# Altium PCB S52最小系统.PcbDoc (part 8 of 9)
Units mm, origin at the board's own origin, x right, y up, seen from the top; angles counter-clockwise.
Board outline 152.4 x 101.6 mm, 2 copper layers (Top Layer, Bottom Layer); 29 components, 53 nets, 176 pads, 2 vias.
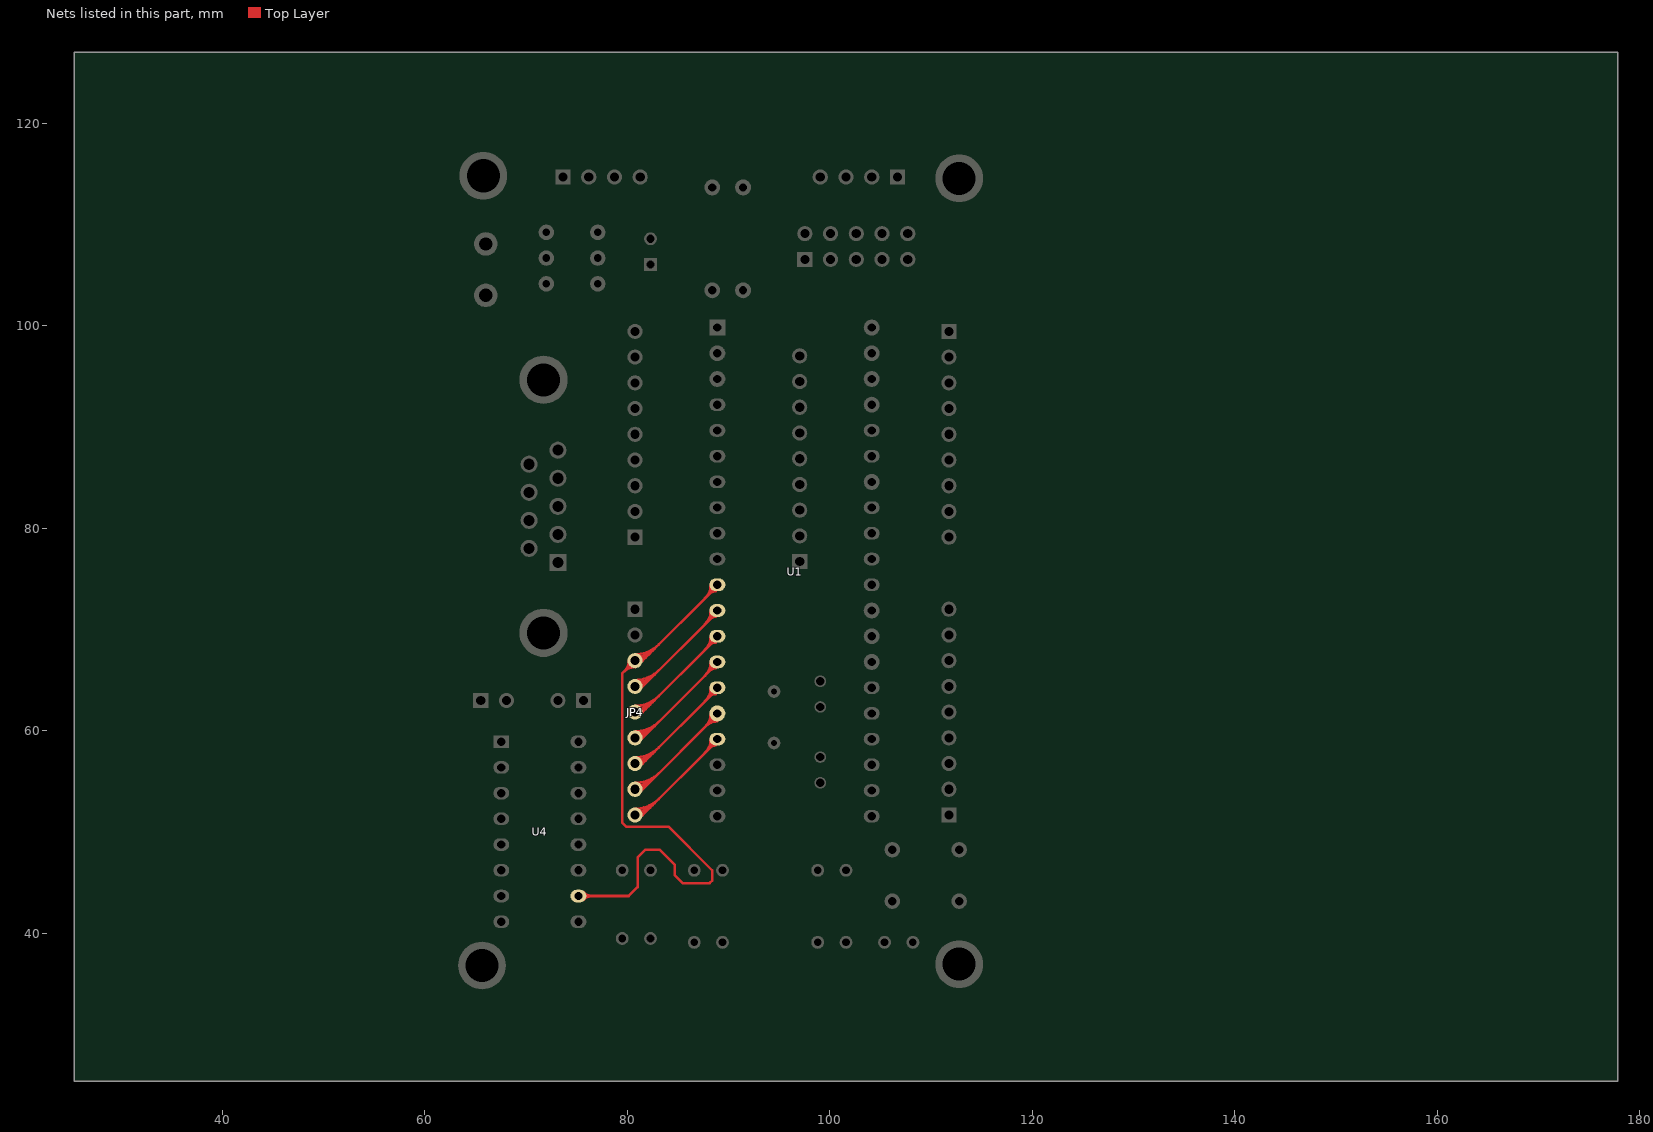
[diagram p8: the nets of this part, all layers, seen from the top]

## Via types
v1: diameter 1.27, hole 0.711, Top Layer to Bottom Layer, 2 vias

## Nets (pads, with @x,y where several pads share a name; then routed paths per layer and width w, separated by ;. In a path a pad name is that pad's centre, name@x,y a point inside that pad or via, vN(x,y) a via of type N, cw(c..) or ccw(c..) an arc to the next point about the centre after c; other vN are vias at no path point) (continued)
NetJP4_3: JP4.3 U1.11 U4.10 | length 177.4
  Top Layer w0.254: U4.10@75.18,43.687 80.136,43.687 81.026,44.577 81.026,47.498 81.788,48.26 83.185,48.26 84.709,46.736 84.709,45.72 85.471,44.958 88.138,44.958 88.392,45.212 88.392,46.228 84.074,50.546 79.883,50.546 79.502,50.927 79.502,65.659 JP4.3@80.772,66.929 81.531,66.929 ; U1.11@88.896,74.294 81.531,66.929 ; 76.545,43.687 cw(c76.545,44.889) 75.695,44.039 ccw(c76.545,44.889) 76.545,43.687 ; 76.545,43.687 ccw(c76.545,42.485) 75.695,43.335 cw(c76.545,42.485) 76.545,43.687 ; 79.708,65.865 cw(c80.772,64.802) 80.772,66.306 ccw(c80.772,64.802) 79.708,65.865 ; 79.708,65.865 ccw(c78.645,66.929) 80.149,66.929 cw(c78.645,66.929) 79.708,65.865 ; 80.142,66.299 cw(c80.772,65.669) 80.772,66.56 ccw(c80.772,65.669) 80.142,66.299 ; 80.142,66.299 ccw(c79.512,66.929) 80.403,66.929 cw(c79.512,66.929) 80.142,66.299 ; JP4.3@80.772,66.79 ccw(c80.772,68.287) 81.831,67.229 ; JP4.3@80.772,66.79 ccw(c80.772,68.287) 81.831,67.229 ; JP4.3@80.772,66.79 ccw(c80.772,68.287) 81.831,67.229 ; JP4.3@80.772,66.79 ccw(c80.772,68.287) 81.831,67.229 ; JP4.3@80.772,66.79 ccw(c80.772,68.287) 81.831,67.229 ; JP4.3@80.772,66.79 ccw(c80.772,68.287) 81.831,67.229 ; JP4.3@80.772,66.79 ccw(c80.772,68.287) 81.831,67.229 ; JP4.3@80.772,66.79 ccw(c80.772,68.287) 81.831,67.229 ; JP4.3@80.772,66.79 ccw(c80.772,68.287) 81.831,67.229 ; JP4.3@80.772,66.79 ccw(c80.772,68.287) 81.831,67.229 ; JP4.3@80.772,67.044 ccw(c80.772,69.154) 82.264,67.662 ; JP4.3@80.772,67.044 ccw(c80.772,69.154) 82.264,67.662 ; JP4.3@80.772,67.044 ccw(c80.772,69.154) 82.264,67.662 ; JP4.3@80.772,67.044 ccw(c80.772,69.154) 82.264,67.662 ; JP4.3@80.772,67.044 ccw(c80.772,69.154) 82.264,67.662 ; JP4.3@80.772,67.044 ccw(c80.772,69.154) 82.264,67.662 ; JP4.3@80.772,67.044 ccw(c80.772,69.154) 82.264,67.662 ; JP4.3@80.772,67.044 ccw(c80.772,69.154) 82.264,67.662 ; JP4.3@80.772,67.044 ccw(c80.772,69.154) 82.264,67.662 ; JP4.3@80.772,67.044 ccw(c80.772,69.154) 82.264,67.662 ; JP4.3@80.772,67.298 ccw(c80.772,70.022) 82.698,68.096 ; JP4.3@80.772,67.298 ccw(c80.772,70.022) 82.698,68.096 ; JP4.3@80.772,67.298 ccw(c80.772,70.022) 82.698,68.096 ; JP4.3@80.772,67.298 ccw(c80.772,70.022) 82.698,68.096 ; JP4.3@80.772,67.298 ccw(c80.772,70.022) 82.698,68.096 ; JP4.3@80.772,67.298 ccw(c80.772,70.022) 82.698,68.096 ; JP4.3@80.772,67.298 ccw(c80.772,70.022) 82.698,68.096 ; JP4.3@80.772,67.298 ccw(c80.772,70.022) 82.698,68.096 ; JP4.3@80.772,67.298 ccw(c80.772,70.022) 82.698,68.096 ; JP4.3@80.772,67.298 ccw(c80.772,70.022) 82.698,68.096 ; JP4.3@80.772,67.552 ccw(c80.772,70.889) 83.132,68.529 ; JP4.3@80.772,67.552 ccw(c80.772,70.889) 83.132,68.529 ; JP4.3@80.772,67.552 ccw(c80.772,70.889) 83.132,68.529 ; JP4.3@80.772,67.552 ccw(c80.772,70.889) 83.132,68.529 ; JP4.3@80.772,67.552 ccw(c80.772,70.889) 83.132,68.529 ; JP4.3@80.772,67.552 ccw(c80.772,70.889) 83.132,68.529 ; JP4.3@80.772,67.552 ccw(c80.772,70.889) 83.132,68.529 ; JP4.3@80.772,67.552 ccw(c80.772,70.889) 83.132,68.529 ; JP4.3@80.772,67.552 ccw(c80.772,70.889) 83.132,68.529 ; JP4.3@80.772,67.552 ccw(c80.772,70.889) 83.132,68.529 ; JP4.3@81.383,66.807 cw(c81.531,66.778) 81.531,66.929 ; JP4.3@81.383,66.807 cw(c81.531,66.778) 81.531,66.929 ; JP4.3@81.383,66.807 cw(c81.531,66.778) 81.531,66.929 ; JP4.3@81.383,66.807 cw(c81.531,66.778) 81.531,66.929 ; JP4.3@81.383,66.807 cw(c81.531,66.778) 81.531,66.929 ; JP4.3@81.383,66.807 cw(c81.531,66.778) 81.531,66.929 ; JP4.3@81.383,66.807 cw(c81.531,66.778) 81.531,66.929 ; JP4.3@81.383,66.807 cw(c81.531,66.778) 81.531,66.929 ; JP4.3@81.383,66.807 cw(c81.531,66.778) 81.531,66.929 ; JP4.3@81.383,66.807 cw(c81.531,66.778) 81.531,66.929 ; JP4.3@81.383,67.051 ccw(c81.531,67.08) 81.531,66.929 ; JP4.3@81.383,67.051 ccw(c81.531,67.08) 81.531,66.929 ; JP4.3@81.383,67.051 ccw(c81.531,67.08) 81.531,66.929 ; JP4.3@81.383,67.051 ccw(c81.531,67.08) 81.531,66.929 ; JP4.3@81.383,67.051 ccw(c81.531,67.08) 81.531,66.929 ; JP4.3@81.383,67.051 ccw(c81.531,67.08) 81.531,66.929 ; JP4.3@81.383,67.051 ccw(c81.531,67.08) 81.531,66.929 ; JP4.3@81.383,67.051 ccw(c81.531,67.08) 81.531,66.929 ; JP4.3@81.383,67.051 ccw(c81.531,67.08) 81.531,66.929 ; JP4.3@81.383,67.051 ccw(c81.531,67.08) 81.531,66.929 ; 87.679,73.077 ccw(c86.335,74.421) U1.11@88.236,74.421 ; 87.679,73.077 ccw(c86.335,74.421) U1.11@88.236,74.421 ; 87.679,73.077 ccw(c86.335,74.421) U1.11@88.236,74.421 ; 87.679,73.077 ccw(c86.335,74.421) U1.11@88.236,74.421 ; 87.769,73.167 ccw(c86.641,74.294) U1.11@88.236,74.294 ; 87.769,73.167 ccw(c86.641,74.294) U1.11@88.236,74.294 ; 87.769,73.167 ccw(c86.641,74.294) U1.11@88.236,74.294 ; 87.769,73.167 ccw(c86.641,74.294) U1.11@88.236,74.294 ; 87.769,73.167 ccw(c86.641,74.294) U1.11@88.236,74.294 ; 87.769,73.167 ccw(c86.641,74.294) U1.11@88.236,74.294 ; 88.113,73.51 ccw(c87.202,74.421) U1.11@88.49,74.421 ; 88.113,73.51 ccw(c87.202,74.421) U1.11@88.49,74.421 ; 88.113,73.51 ccw(c87.202,74.421) U1.11@88.49,74.421 ; 88.113,73.51 ccw(c87.202,74.421) U1.11@88.49,74.421 ; 88.161,73.559 cw(c88.734,72.986) U1.11@88.734,73.796 ; 88.161,73.559 cw(c88.734,72.986) U1.11@88.734,73.796 ; 88.161,73.559 cw(c88.734,72.986) U1.11@88.734,73.796 ; 88.161,73.559 cw(c88.734,72.986) U1.11@88.734,73.796 ; 88.161,73.559 cw(c88.734,72.986) U1.11@88.734,73.796 ; 88.161,73.559 cw(c88.734,72.986) U1.11@88.734,73.796 ; 88.202,73.6 ccw(c87.509,74.294) U1.11@88.49,74.294 ; 88.202,73.6 ccw(c87.509,74.294) U1.11@88.49,74.294 ; 88.202,73.6 ccw(c87.509,74.294) U1.11@88.49,74.294 ; 88.202,73.6 ccw(c87.509,74.294) U1.11@88.49,74.294 ; 88.202,73.6 ccw(c87.509,74.294) U1.11@88.49,74.294 ; 88.202,73.6 ccw(c87.509,74.294) U1.11@88.49,74.294 ; 88.378,73.775 cw(c88.734,73.419) U1.11@88.734,73.923 ; 88.378,73.775 cw(c88.734,73.419) U1.11@88.734,73.923 ; 88.378,73.775 cw(c88.734,73.419) U1.11@88.734,73.923 ; 88.378,73.775 cw(c88.734,73.419) U1.11@88.734,73.923
NetJP4_4: JP4.4 U1.12 | length 118.8
  Top Layer w0.254: JP4.4@80.772,64.389 81.531,64.389 ; U1.12@88.896,71.754 81.531,64.389 ; JP4.4@80.772,64.25 ccw(c80.772,65.747) 81.831,64.689 ; JP4.4@80.772,64.25 ccw(c80.772,65.747) 81.831,64.689 ; JP4.4@80.772,64.25 ccw(c80.772,65.747) 81.831,64.689 ; JP4.4@80.772,64.25 ccw(c80.772,65.747) 81.831,64.689 ; JP4.4@80.772,64.25 ccw(c80.772,65.747) 81.831,64.689 ; JP4.4@80.772,64.25 ccw(c80.772,65.747) 81.831,64.689 ; JP4.4@80.772,64.25 ccw(c80.772,65.747) 81.831,64.689 ; JP4.4@80.772,64.25 ccw(c80.772,65.747) 81.831,64.689 ; JP4.4@80.772,64.25 ccw(c80.772,65.747) 81.831,64.689 ; JP4.4@80.772,64.25 ccw(c80.772,65.747) 81.831,64.689 ; JP4.4@80.772,64.504 ccw(c80.772,66.614) 82.264,65.122 ; JP4.4@80.772,64.504 ccw(c80.772,66.614) 82.264,65.122 ; JP4.4@80.772,64.504 ccw(c80.772,66.614) 82.264,65.122 ; JP4.4@80.772,64.504 ccw(c80.772,66.614) 82.264,65.122 ; JP4.4@80.772,64.504 ccw(c80.772,66.614) 82.264,65.122 ; JP4.4@80.772,64.504 ccw(c80.772,66.614) 82.264,65.122 ; JP4.4@80.772,64.504 ccw(c80.772,66.614) 82.264,65.122 ; JP4.4@80.772,64.504 ccw(c80.772,66.614) 82.264,65.122 ; JP4.4@80.772,64.504 ccw(c80.772,66.614) 82.264,65.122 ; JP4.4@80.772,64.504 ccw(c80.772,66.614) 82.264,65.122 ; JP4.4@80.772,64.758 ccw(c80.772,67.482) 82.698,65.556 ; JP4.4@80.772,64.758 ccw(c80.772,67.482) 82.698,65.556 ; JP4.4@80.772,64.758 ccw(c80.772,67.482) 82.698,65.556 ; JP4.4@80.772,64.758 ccw(c80.772,67.482) 82.698,65.556 ; JP4.4@80.772,64.758 ccw(c80.772,67.482) 82.698,65.556 ; JP4.4@80.772,64.758 ccw(c80.772,67.482) 82.698,65.556 ; JP4.4@80.772,64.758 ccw(c80.772,67.482) 82.698,65.556 ; JP4.4@80.772,64.758 ccw(c80.772,67.482) 82.698,65.556 ; JP4.4@80.772,64.758 ccw(c80.772,67.482) 82.698,65.556 ; JP4.4@80.772,64.758 ccw(c80.772,67.482) 82.698,65.556 ; JP4.4@80.772,65.012 ccw(c80.772,68.349) 83.132,65.989 ; JP4.4@80.772,65.012 ccw(c80.772,68.349) 83.132,65.989 ; JP4.4@80.772,65.012 ccw(c80.772,68.349) 83.132,65.989 ; JP4.4@80.772,65.012 ccw(c80.772,68.349) 83.132,65.989 ; JP4.4@80.772,65.012 ccw(c80.772,68.349) 83.132,65.989 ; JP4.4@80.772,65.012 ccw(c80.772,68.349) 83.132,65.989 ; JP4.4@80.772,65.012 ccw(c80.772,68.349) 83.132,65.989 ; JP4.4@80.772,65.012 ccw(c80.772,68.349) 83.132,65.989 ; JP4.4@80.772,65.012 ccw(c80.772,68.349) 83.132,65.989 ; JP4.4@80.772,65.012 ccw(c80.772,68.349) 83.132,65.989 ; JP4.4@81.383,64.267 cw(c81.531,64.238) 81.531,64.389 ; JP4.4@81.383,64.267 cw(c81.531,64.238) 81.531,64.389 ; JP4.4@81.383,64.267 cw(c81.531,64.238) 81.531,64.389 ; JP4.4@81.383,64.267 cw(c81.531,64.238) 81.531,64.389 ; JP4.4@81.383,64.267 cw(c81.531,64.238) 81.531,64.389 ; JP4.4@81.383,64.267 cw(c81.531,64.238) 81.531,64.389 ; JP4.4@81.383,64.267 cw(c81.531,64.238) 81.531,64.389 ; JP4.4@81.383,64.267 cw(c81.531,64.238) 81.531,64.389 ; JP4.4@81.383,64.267 cw(c81.531,64.238) 81.531,64.389 ; JP4.4@81.383,64.267 cw(c81.531,64.238) 81.531,64.389 ; JP4.4@81.383,64.511 ccw(c81.531,64.54) 81.531,64.389 ; JP4.4@81.383,64.511 ccw(c81.531,64.54) 81.531,64.389 ; JP4.4@81.383,64.511 ccw(c81.531,64.54) 81.531,64.389 ; JP4.4@81.383,64.511 ccw(c81.531,64.54) 81.531,64.389 ; JP4.4@81.383,64.511 ccw(c81.531,64.54) 81.531,64.389 ; JP4.4@81.383,64.511 ccw(c81.531,64.54) 81.531,64.389 ; JP4.4@81.383,64.511 ccw(c81.531,64.54) 81.531,64.389 ; JP4.4@81.383,64.511 ccw(c81.531,64.54) 81.531,64.389 ; JP4.4@81.383,64.511 ccw(c81.531,64.54) 81.531,64.389 ; JP4.4@81.383,64.511 ccw(c81.531,64.54) 81.531,64.389 ; 87.679,70.537 ccw(c86.335,71.881) U1.12@88.236,71.881 ; 87.679,70.537 ccw(c86.335,71.881) U1.12@88.236,71.881 ; 87.679,70.537 ccw(c86.335,71.881) U1.12@88.236,71.881 ; 87.679,70.537 ccw(c86.335,71.881) U1.12@88.236,71.881 ; 87.769,70.627 ccw(c86.641,71.754) U1.12@88.236,71.754 ; 87.769,70.627 ccw(c86.641,71.754) U1.12@88.236,71.754 ; 87.769,70.627 ccw(c86.641,71.754) U1.12@88.236,71.754 ; 87.769,70.627 ccw(c86.641,71.754) U1.12@88.236,71.754 ; 87.769,70.627 ccw(c86.641,71.754) U1.12@88.236,71.754 ; 87.769,70.627 ccw(c86.641,71.754) U1.12@88.236,71.754 ; 88.113,70.97 ccw(c87.202,71.881) U1.12@88.49,71.881 ; 88.113,70.97 ccw(c87.202,71.881) U1.12@88.49,71.881 ; 88.113,70.97 ccw(c87.202,71.881) U1.12@88.49,71.881 ; 88.113,70.97 ccw(c87.202,71.881) U1.12@88.49,71.881 ; 88.161,71.019 cw(c88.734,70.446) U1.12@88.734,71.256 ; 88.161,71.019 cw(c88.734,70.446) U1.12@88.734,71.256 ; 88.161,71.019 cw(c88.734,70.446) U1.12@88.734,71.256 ; 88.161,71.019 cw(c88.734,70.446) U1.12@88.734,71.256 ; 88.161,71.019 cw(c88.734,70.446) U1.12@88.734,71.256 ; 88.161,71.019 cw(c88.734,70.446) U1.12@88.734,71.256 ; 88.202,71.06 ccw(c87.509,71.754) U1.12@88.49,71.754 ; 88.202,71.06 ccw(c87.509,71.754) U1.12@88.49,71.754 ; 88.202,71.06 ccw(c87.509,71.754) U1.12@88.49,71.754 ; 88.202,71.06 ccw(c87.509,71.754) U1.12@88.49,71.754 ; 88.202,71.06 ccw(c87.509,71.754) U1.12@88.49,71.754 ; 88.202,71.06 ccw(c87.509,71.754) U1.12@88.49,71.754 ; 88.378,71.235 cw(c88.734,70.879) U1.12@88.734,71.383 ; 88.378,71.235 cw(c88.734,70.879) U1.12@88.734,71.383 ; 88.378,71.235 cw(c88.734,70.879) U1.12@88.734,71.383 ; 88.378,71.235 cw(c88.734,70.879) U1.12@88.734,71.383
NetJP4_5: JP4.5 U1.13 | length 118.8
  Top Layer w0.254: JP4.5@80.772,61.849 81.531,61.849 ; U1.13@88.896,69.214 81.531,61.849 ; JP4.5@80.772,61.71 ccw(c80.772,63.207) 81.831,62.149 ; JP4.5@80.772,61.71 ccw(c80.772,63.207) 81.831,62.149 ; JP4.5@80.772,61.71 ccw(c80.772,63.207) 81.831,62.149 ; JP4.5@80.772,61.71 ccw(c80.772,63.207) 81.831,62.149 ; JP4.5@80.772,61.71 ccw(c80.772,63.207) 81.831,62.149 ; JP4.5@80.772,61.71 ccw(c80.772,63.207) 81.831,62.149 ; JP4.5@80.772,61.71 ccw(c80.772,63.207) 81.831,62.149 ; JP4.5@80.772,61.71 ccw(c80.772,63.207) 81.831,62.149 ; JP4.5@80.772,61.71 ccw(c80.772,63.207) 81.831,62.149 ; JP4.5@80.772,61.71 ccw(c80.772,63.207) 81.831,62.149 ; JP4.5@80.772,61.964 ccw(c80.772,64.074) 82.264,62.582 ; JP4.5@80.772,61.964 ccw(c80.772,64.074) 82.264,62.582 ; JP4.5@80.772,61.964 ccw(c80.772,64.074) 82.264,62.582 ; JP4.5@80.772,61.964 ccw(c80.772,64.074) 82.264,62.582 ; JP4.5@80.772,61.964 ccw(c80.772,64.074) 82.264,62.582 ; JP4.5@80.772,61.964 ccw(c80.772,64.074) 82.264,62.582 ; JP4.5@80.772,61.964 ccw(c80.772,64.074) 82.264,62.582 ; JP4.5@80.772,61.964 ccw(c80.772,64.074) 82.264,62.582 ; JP4.5@80.772,61.964 ccw(c80.772,64.074) 82.264,62.582 ; JP4.5@80.772,61.964 ccw(c80.772,64.074) 82.264,62.582 ; JP4.5@80.772,62.218 ccw(c80.772,64.942) 82.698,63.016 ; JP4.5@80.772,62.218 ccw(c80.772,64.942) 82.698,63.016 ; JP4.5@80.772,62.218 ccw(c80.772,64.942) 82.698,63.016 ; JP4.5@80.772,62.218 ccw(c80.772,64.942) 82.698,63.016 ; JP4.5@80.772,62.218 ccw(c80.772,64.942) 82.698,63.016 ; JP4.5@80.772,62.218 ccw(c80.772,64.942) 82.698,63.016 ; JP4.5@80.772,62.218 ccw(c80.772,64.942) 82.698,63.016 ; JP4.5@80.772,62.218 ccw(c80.772,64.942) 82.698,63.016 ; JP4.5@80.772,62.218 ccw(c80.772,64.942) 82.698,63.016 ; JP4.5@80.772,62.218 ccw(c80.772,64.942) 82.698,63.016 ; JP4.5@80.772,62.472 ccw(c80.772,65.809) 83.132,63.449 ; JP4.5@80.772,62.472 ccw(c80.772,65.809) 83.132,63.449 ; JP4.5@80.772,62.472 ccw(c80.772,65.809) 83.132,63.449 ; JP4.5@80.772,62.472 ccw(c80.772,65.809) 83.132,63.449 ; JP4.5@80.772,62.472 ccw(c80.772,65.809) 83.132,63.449 ; JP4.5@80.772,62.472 ccw(c80.772,65.809) 83.132,63.449 ; JP4.5@80.772,62.472 ccw(c80.772,65.809) 83.132,63.449 ; JP4.5@80.772,62.472 ccw(c80.772,65.809) 83.132,63.449 ; JP4.5@80.772,62.472 ccw(c80.772,65.809) 83.132,63.449 ; JP4.5@80.772,62.472 ccw(c80.772,65.809) 83.132,63.449 ; JP4.5@81.383,61.727 cw(c81.531,61.698) 81.531,61.849 ; JP4.5@81.383,61.727 cw(c81.531,61.698) 81.531,61.849 ; JP4.5@81.383,61.727 cw(c81.531,61.698) 81.531,61.849 ; JP4.5@81.383,61.727 cw(c81.531,61.698) 81.531,61.849 ; JP4.5@81.383,61.727 cw(c81.531,61.698) 81.531,61.849 ; JP4.5@81.383,61.727 cw(c81.531,61.698) 81.531,61.849 ; JP4.5@81.383,61.727 cw(c81.531,61.698) 81.531,61.849 ; JP4.5@81.383,61.727 cw(c81.531,61.698) 81.531,61.849 ; JP4.5@81.383,61.727 cw(c81.531,61.698) 81.531,61.849 ; JP4.5@81.383,61.727 cw(c81.531,61.698) 81.531,61.849 ; JP4.5@81.383,61.971 ccw(c81.531,62) 81.531,61.849 ; JP4.5@81.383,61.971 ccw(c81.531,62) 81.531,61.849 ; JP4.5@81.383,61.971 ccw(c81.531,62) 81.531,61.849 ; JP4.5@81.383,61.971 ccw(c81.531,62) 81.531,61.849 ; JP4.5@81.383,61.971 ccw(c81.531,62) 81.531,61.849 ; JP4.5@81.383,61.971 ccw(c81.531,62) 81.531,61.849 ; JP4.5@81.383,61.971 ccw(c81.531,62) 81.531,61.849 ; JP4.5@81.383,61.971 ccw(c81.531,62) 81.531,61.849 ; JP4.5@81.383,61.971 ccw(c81.531,62) 81.531,61.849 ; JP4.5@81.383,61.971 ccw(c81.531,62) 81.531,61.849 ; 87.679,67.997 ccw(c86.335,69.341) U1.13@88.236,69.341 ; 87.679,67.997 ccw(c86.335,69.341) U1.13@88.236,69.341 ; 87.679,67.997 ccw(c86.335,69.341) U1.13@88.236,69.341 ; 87.679,67.997 ccw(c86.335,69.341) U1.13@88.236,69.341 ; 87.769,68.087 ccw(c86.641,69.214) U1.13@88.236,69.214 ; 87.769,68.087 ccw(c86.641,69.214) U1.13@88.236,69.214 ; 87.769,68.087 ccw(c86.641,69.214) U1.13@88.236,69.214 ; 87.769,68.087 ccw(c86.641,69.214) U1.13@88.236,69.214 ; 87.769,68.087 ccw(c86.641,69.214) U1.13@88.236,69.214 ; 87.769,68.087 ccw(c86.641,69.214) U1.13@88.236,69.214 ; 88.113,68.43 ccw(c87.202,69.341) U1.13@88.49,69.341 ; 88.113,68.43 ccw(c87.202,69.341) U1.13@88.49,69.341 ; 88.113,68.43 ccw(c87.202,69.341) U1.13@88.49,69.341 ; 88.113,68.43 ccw(c87.202,69.341) U1.13@88.49,69.341 ; 88.161,68.479 cw(c88.734,67.906) U1.13@88.734,68.716 ; 88.161,68.479 cw(c88.734,67.906) U1.13@88.734,68.716 ; 88.161,68.479 cw(c88.734,67.906) U1.13@88.734,68.716 ; 88.161,68.479 cw(c88.734,67.906) U1.13@88.734,68.716 ; 88.161,68.479 cw(c88.734,67.906) U1.13@88.734,68.716 ; 88.161,68.479 cw(c88.734,67.906) U1.13@88.734,68.716 ; 88.202,68.52 ccw(c87.509,69.214) U1.13@88.49,69.214 ; 88.202,68.52 ccw(c87.509,69.214) U1.13@88.49,69.214 ; 88.202,68.52 ccw(c87.509,69.214) U1.13@88.49,69.214 ; 88.202,68.52 ccw(c87.509,69.214) U1.13@88.49,69.214 ; 88.202,68.52 ccw(c87.509,69.214) U1.13@88.49,69.214 ; 88.202,68.52 ccw(c87.509,69.214) U1.13@88.49,69.214 ; 88.378,68.695 cw(c88.734,68.339) U1.13@88.734,68.843 ; 88.378,68.695 cw(c88.734,68.339) U1.13@88.734,68.843 ; 88.378,68.695 cw(c88.734,68.339) U1.13@88.734,68.843 ; 88.378,68.695 cw(c88.734,68.339) U1.13@88.734,68.843
NetJP4_6: JP4.6 U1.14 | length 118.8
  Top Layer w0.254: JP4.6@80.772,59.309 81.531,59.309 ; U1.14@88.896,66.674 81.531,59.309 ; JP4.6@80.772,59.17 ccw(c80.772,60.667) 81.831,59.609 ; JP4.6@80.772,59.17 ccw(c80.772,60.667) 81.831,59.609 ; JP4.6@80.772,59.17 ccw(c80.772,60.667) 81.831,59.609 ; JP4.6@80.772,59.17 ccw(c80.772,60.667) 81.831,59.609 ; JP4.6@80.772,59.17 ccw(c80.772,60.667) 81.831,59.609 ; JP4.6@80.772,59.17 ccw(c80.772,60.667) 81.831,59.609 ; JP4.6@80.772,59.17 ccw(c80.772,60.667) 81.831,59.609 ; JP4.6@80.772,59.17 ccw(c80.772,60.667) 81.831,59.609 ; JP4.6@80.772,59.17 ccw(c80.772,60.667) 81.831,59.609 ; JP4.6@80.772,59.17 ccw(c80.772,60.667) 81.831,59.609 ; JP4.6@80.772,59.424 ccw(c80.772,61.534) 82.264,60.042 ; JP4.6@80.772,59.424 ccw(c80.772,61.534) 82.264,60.042 ; JP4.6@80.772,59.424 ccw(c80.772,61.534) 82.264,60.042 ; JP4.6@80.772,59.424 ccw(c80.772,61.534) 82.264,60.042 ; JP4.6@80.772,59.424 ccw(c80.772,61.534) 82.264,60.042 ; JP4.6@80.772,59.424 ccw(c80.772,61.534) 82.264,60.042 ; JP4.6@80.772,59.424 ccw(c80.772,61.534) 82.264,60.042 ; JP4.6@80.772,59.424 ccw(c80.772,61.534) 82.264,60.042 ; JP4.6@80.772,59.424 ccw(c80.772,61.534) 82.264,60.042 ; JP4.6@80.772,59.424 ccw(c80.772,61.534) 82.264,60.042 ; JP4.6@80.772,59.678 ccw(c80.772,62.402) 82.698,60.476 ; JP4.6@80.772,59.678 ccw(c80.772,62.402) 82.698,60.476 ; JP4.6@80.772,59.678 ccw(c80.772,62.402) 82.698,60.476 ; JP4.6@80.772,59.678 ccw(c80.772,62.402) 82.698,60.476 ; JP4.6@80.772,59.678 ccw(c80.772,62.402) 82.698,60.476 ; JP4.6@80.772,59.678 ccw(c80.772,62.402) 82.698,60.476 ; JP4.6@80.772,59.678 ccw(c80.772,62.402) 82.698,60.476 ; JP4.6@80.772,59.678 ccw(c80.772,62.402) 82.698,60.476 ; JP4.6@80.772,59.678 ccw(c80.772,62.402) 82.698,60.476 ; JP4.6@80.772,59.678 ccw(c80.772,62.402) 82.698,60.476 ; JP4.6@80.772,59.932 ccw(c80.772,63.269) 83.132,60.909 ; JP4.6@80.772,59.932 ccw(c80.772,63.269) 83.132,60.909 ; JP4.6@80.772,59.932 ccw(c80.772,63.269) 83.132,60.909 ; JP4.6@80.772,59.932 ccw(c80.772,63.269) 83.132,60.909 ; JP4.6@80.772,59.932 ccw(c80.772,63.269) 83.132,60.909 ; JP4.6@80.772,59.932 ccw(c80.772,63.269) 83.132,60.909 ; JP4.6@80.772,59.932 ccw(c80.772,63.269) 83.132,60.909 ; JP4.6@80.772,59.932 ccw(c80.772,63.269) 83.132,60.909 ; JP4.6@80.772,59.932 ccw(c80.772,63.269) 83.132,60.909 ; JP4.6@80.772,59.932 ccw(c80.772,63.269) 83.132,60.909 ; JP4.6@81.383,59.187 cw(c81.531,59.158) 81.531,59.309 ; JP4.6@81.383,59.187 cw(c81.531,59.158) 81.531,59.309 ; JP4.6@81.383,59.187 cw(c81.531,59.158) 81.531,59.309 ; JP4.6@81.383,59.187 cw(c81.531,59.158) 81.531,59.309 ; JP4.6@81.383,59.187 cw(c81.531,59.158) 81.531,59.309 ; JP4.6@81.383,59.187 cw(c81.531,59.158) 81.531,59.309 ; JP4.6@81.383,59.187 cw(c81.531,59.158) 81.531,59.309 ; JP4.6@81.383,59.187 cw(c81.531,59.158) 81.531,59.309 ; JP4.6@81.383,59.187 cw(c81.531,59.158) 81.531,59.309 ; JP4.6@81.383,59.187 cw(c81.531,59.158) 81.531,59.309 ; JP4.6@81.383,59.431 ccw(c81.531,59.46) 81.531,59.309 ; JP4.6@81.383,59.431 ccw(c81.531,59.46) 81.531,59.309 ; JP4.6@81.383,59.431 ccw(c81.531,59.46) 81.531,59.309 ; JP4.6@81.383,59.431 ccw(c81.531,59.46) 81.531,59.309 ; JP4.6@81.383,59.431 ccw(c81.531,59.46) 81.531,59.309 ; JP4.6@81.383,59.431 ccw(c81.531,59.46) 81.531,59.309 ; JP4.6@81.383,59.431 ccw(c81.531,59.46) 81.531,59.309 ; JP4.6@81.383,59.431 ccw(c81.531,59.46) 81.531,59.309 ; JP4.6@81.383,59.431 ccw(c81.531,59.46) 81.531,59.309 ; JP4.6@81.383,59.431 ccw(c81.531,59.46) 81.531,59.309 ; 87.679,65.457 ccw(c86.335,66.801) U1.14@88.236,66.801 ; 87.679,65.457 ccw(c86.335,66.801) U1.14@88.236,66.801 ; 87.679,65.457 ccw(c86.335,66.801) U1.14@88.236,66.801 ; 87.679,65.457 ccw(c86.335,66.801) U1.14@88.236,66.801 ; 87.769,65.547 ccw(c86.641,66.674) U1.14@88.236,66.674 ; 87.769,65.547 ccw(c86.641,66.674) U1.14@88.236,66.674 ; 87.769,65.547 ccw(c86.641,66.674) U1.14@88.236,66.674 ; 87.769,65.547 ccw(c86.641,66.674) U1.14@88.236,66.674 ; 87.769,65.547 ccw(c86.641,66.674) U1.14@88.236,66.674 ; 87.769,65.547 ccw(c86.641,66.674) U1.14@88.236,66.674 ; 88.113,65.89 ccw(c87.202,66.801) U1.14@88.49,66.801 ; 88.113,65.89 ccw(c87.202,66.801) U1.14@88.49,66.801 ; 88.113,65.89 ccw(c87.202,66.801) U1.14@88.49,66.801 ; 88.113,65.89 ccw(c87.202,66.801) U1.14@88.49,66.801 ; 88.161,65.939 cw(c88.734,65.366) U1.14@88.734,66.176 ; 88.161,65.939 cw(c88.734,65.366) U1.14@88.734,66.176 ; 88.161,65.939 cw(c88.734,65.366) U1.14@88.734,66.176 ; 88.161,65.939 cw(c88.734,65.366) U1.14@88.734,66.176 ; 88.161,65.939 cw(c88.734,65.366) U1.14@88.734,66.176 ; 88.161,65.939 cw(c88.734,65.366) U1.14@88.734,66.176 ; 88.202,65.98 ccw(c87.509,66.674) U1.14@88.49,66.674 ; 88.202,65.98 ccw(c87.509,66.674) U1.14@88.49,66.674 ; 88.202,65.98 ccw(c87.509,66.674) U1.14@88.49,66.674 ; 88.202,65.98 ccw(c87.509,66.674) U1.14@88.49,66.674 ; 88.202,65.98 ccw(c87.509,66.674) U1.14@88.49,66.674 ; 88.202,65.98 ccw(c87.509,66.674) U1.14@88.49,66.674 ; 88.378,66.155 cw(c88.734,65.799) U1.14@88.734,66.303 ; 88.378,66.155 cw(c88.734,65.799) U1.14@88.734,66.303 ; 88.378,66.155 cw(c88.734,65.799) U1.14@88.734,66.303 ; 88.378,66.155 cw(c88.734,65.799) U1.14@88.734,66.303
NetJP4_7: JP4.7 U1.15 | length 118.8
  Top Layer w0.254: JP4.7@80.772,56.769 81.531,56.769 ; U1.15@88.896,64.134 81.531,56.769 ; JP4.7@80.772,56.63 ccw(c80.772,58.127) 81.831,57.069 ; JP4.7@80.772,56.63 ccw(c80.772,58.127) 81.831,57.069 ; JP4.7@80.772,56.63 ccw(c80.772,58.127) 81.831,57.069 ; JP4.7@80.772,56.63 ccw(c80.772,58.127) 81.831,57.069 ; JP4.7@80.772,56.63 ccw(c80.772,58.127) 81.831,57.069 ; JP4.7@80.772,56.63 ccw(c80.772,58.127) 81.831,57.069 ; JP4.7@80.772,56.63 ccw(c80.772,58.127) 81.831,57.069 ; JP4.7@80.772,56.63 ccw(c80.772,58.127) 81.831,57.069 ; JP4.7@80.772,56.63 ccw(c80.772,58.127) 81.831,57.069 ; JP4.7@80.772,56.63 ccw(c80.772,58.127) 81.831,57.069 ; JP4.7@80.772,56.884 ccw(c80.772,58.994) 82.264,57.502 ; JP4.7@80.772,56.884 ccw(c80.772,58.994) 82.264,57.502 ; JP4.7@80.772,56.884 ccw(c80.772,58.994) 82.264,57.502 ; JP4.7@80.772,56.884 ccw(c80.772,58.994) 82.264,57.502 ; JP4.7@80.772,56.884 ccw(c80.772,58.994) 82.264,57.502 ; JP4.7@80.772,56.884 ccw(c80.772,58.994) 82.264,57.502 ; JP4.7@80.772,56.884 ccw(c80.772,58.994) 82.264,57.502 ; JP4.7@80.772,56.884 ccw(c80.772,58.994) 82.264,57.502 ; JP4.7@80.772,56.884 ccw(c80.772,58.994) 82.264,57.502 ; JP4.7@80.772,56.884 ccw(c80.772,58.994) 82.264,57.502 ; JP4.7@80.772,57.138 ccw(c80.772,59.862) 82.698,57.936 ; JP4.7@80.772,57.138 ccw(c80.772,59.862) 82.698,57.936 ; JP4.7@80.772,57.138 ccw(c80.772,59.862) 82.698,57.936 ; JP4.7@80.772,57.138 ccw(c80.772,59.862) 82.698,57.936 ; JP4.7@80.772,57.138 ccw(c80.772,59.862) 82.698,57.936 ; JP4.7@80.772,57.138 ccw(c80.772,59.862) 82.698,57.936 ; JP4.7@80.772,57.138 ccw(c80.772,59.862) 82.698,57.936 ; JP4.7@80.772,57.138 ccw(c80.772,59.862) 82.698,57.936 ; JP4.7@80.772,57.138 ccw(c80.772,59.862) 82.698,57.936 ; JP4.7@80.772,57.138 ccw(c80.772,59.862) 82.698,57.936 ; JP4.7@80.772,57.392 ccw(c80.772,60.729) 83.132,58.369 ; JP4.7@80.772,57.392 ccw(c80.772,60.729) 83.132,58.369 ; JP4.7@80.772,57.392 ccw(c80.772,60.729) 83.132,58.369 ; JP4.7@80.772,57.392 ccw(c80.772,60.729) 83.132,58.369 ; JP4.7@80.772,57.392 ccw(c80.772,60.729) 83.132,58.369 ; JP4.7@80.772,57.392 ccw(c80.772,60.729) 83.132,58.369 ; JP4.7@80.772,57.392 ccw(c80.772,60.729) 83.132,58.369 ; JP4.7@80.772,57.392 ccw(c80.772,60.729) 83.132,58.369 ; JP4.7@80.772,57.392 ccw(c80.772,60.729) 83.132,58.369 ; JP4.7@80.772,57.392 ccw(c80.772,60.729) 83.132,58.369 ; JP4.7@81.383,56.647 cw(c81.531,56.618) 81.531,56.769 ; JP4.7@81.383,56.647 cw(c81.531,56.618) 81.531,56.769 ; JP4.7@81.383,56.647 cw(c81.531,56.618) 81.531,56.769 ; JP4.7@81.383,56.647 cw(c81.531,56.618) 81.531,56.769 ; JP4.7@81.383,56.647 cw(c81.531,56.618) 81.531,56.769 ; JP4.7@81.383,56.647 cw(c81.531,56.618) 81.531,56.769 ; JP4.7@81.383,56.647 cw(c81.531,56.618) 81.531,56.769 ; JP4.7@81.383,56.647 cw(c81.531,56.618) 81.531,56.769 ; JP4.7@81.383,56.647 cw(c81.531,56.618) 81.531,56.769 ; JP4.7@81.383,56.647 cw(c81.531,56.618) 81.531,56.769 ; JP4.7@81.383,56.891 ccw(c81.531,56.92) 81.531,56.769 ; JP4.7@81.383,56.891 ccw(c81.531,56.92) 81.531,56.769 ; JP4.7@81.383,56.891 ccw(c81.531,56.92) 81.531,56.769 ; JP4.7@81.383,56.891 ccw(c81.531,56.92) 81.531,56.769 ; JP4.7@81.383,56.891 ccw(c81.531,56.92) 81.531,56.769 ; JP4.7@81.383,56.891 ccw(c81.531,56.92) 81.531,56.769 ; JP4.7@81.383,56.891 ccw(c81.531,56.92) 81.531,56.769 ; JP4.7@81.383,56.891 ccw(c81.531,56.92) 81.531,56.769 ; JP4.7@81.383,56.891 ccw(c81.531,56.92) 81.531,56.769 ; JP4.7@81.383,56.891 ccw(c81.531,56.92) 81.531,56.769 ; 87.679,62.917 ccw(c86.335,64.261) U1.15@88.236,64.261 ; 87.679,62.917 ccw(c86.335,64.261) U1.15@88.236,64.261 ; 87.679,62.917 ccw(c86.335,64.261) U1.15@88.236,64.261 ; 87.679,62.917 ccw(c86.335,64.261) U1.15@88.236,64.261 ; 87.769,63.007 ccw(c86.641,64.134) U1.15@88.236,64.134 ; 87.769,63.007 ccw(c86.641,64.134) U1.15@88.236,64.134 ; 87.769,63.007 ccw(c86.641,64.134) U1.15@88.236,64.134 ; 87.769,63.007 ccw(c86.641,64.134) U1.15@88.236,64.134 ; 87.769,63.007 ccw(c86.641,64.134) U1.15@88.236,64.134 ; 87.769,63.007 ccw(c86.641,64.134) U1.15@88.236,64.134 ; 88.113,63.35 ccw(c87.202,64.261) U1.15@88.49,64.261 ; 88.113,63.35 ccw(c87.202,64.261) U1.15@88.49,64.261 ; 88.113,63.35 ccw(c87.202,64.261) U1.15@88.49,64.261 ; 88.113,63.35 ccw(c87.202,64.261) U1.15@88.49,64.261 ; 88.161,63.399 cw(c88.734,62.826) U1.15@88.734,63.636 ; 88.161,63.399 cw(c88.734,62.826) U1.15@88.734,63.636 ; 88.161,63.399 cw(c88.734,62.826) U1.15@88.734,63.636 ; 88.161,63.399 cw(c88.734,62.826) U1.15@88.734,63.636 ; 88.161,63.399 cw(c88.734,62.826) U1.15@88.734,63.636 ; 88.161,63.399 cw(c88.734,62.826) U1.15@88.734,63.636 ; 88.202,63.44 ccw(c87.509,64.134) U1.15@88.49,64.134 ; 88.202,63.44 ccw(c87.509,64.134) U1.15@88.49,64.134 ; 88.202,63.44 ccw(c87.509,64.134) U1.15@88.49,64.134 ; 88.202,63.44 ccw(c87.509,64.134) U1.15@88.49,64.134 ; 88.202,63.44 ccw(c87.509,64.134) U1.15@88.49,64.134 ; 88.202,63.44 ccw(c87.509,64.134) U1.15@88.49,64.134 ; 88.378,63.615 cw(c88.734,63.259) U1.15@88.734,63.763 ; 88.378,63.615 cw(c88.734,63.259) U1.15@88.734,63.763 ; 88.378,63.615 cw(c88.734,63.259) U1.15@88.734,63.763 ; 88.378,63.615 cw(c88.734,63.259) U1.15@88.734,63.763
NetJP4_8: JP4.8 U1.16 | length 129.6
  Top Layer w0.254: JP4.8@80.772,54.229 81.531,54.229 ; U1.16@88.896,61.594 81.531,54.229 ; JP4.8@80.772,54.09 ccw(c80.772,55.587) 81.831,54.529 ; JP4.8@80.772,54.09 ccw(c80.772,55.587) 81.831,54.529 ; JP4.8@80.772,54.09 ccw(c80.772,55.587) 81.831,54.529 ; JP4.8@80.772,54.09 ccw(c80.772,55.587) 81.831,54.529 ; JP4.8@80.772,54.09 ccw(c80.772,55.587) 81.831,54.529 ; JP4.8@80.772,54.09 ccw(c80.772,55.587) 81.831,54.529 ; JP4.8@80.772,54.09 ccw(c80.772,55.587) 81.831,54.529 ; JP4.8@80.772,54.09 ccw(c80.772,55.587) 81.831,54.529 ; JP4.8@80.772,54.09 ccw(c80.772,55.587) 81.831,54.529 ; JP4.8@80.772,54.09 ccw(c80.772,55.587) 81.831,54.529 ; JP4.8@80.772,54.344 ccw(c80.772,56.454) 82.264,54.962 ; JP4.8@80.772,54.344 ccw(c80.772,56.454) 82.264,54.962 ; JP4.8@80.772,54.344 ccw(c80.772,56.454) 82.264,54.962 ; JP4.8@80.772,54.344 ccw(c80.772,56.454) 82.264,54.962 ; JP4.8@80.772,54.344 ccw(c80.772,56.454) 82.264,54.962 ; JP4.8@80.772,54.344 ccw(c80.772,56.454) 82.264,54.962 ; JP4.8@80.772,54.344 ccw(c80.772,56.454) 82.264,54.962 ; JP4.8@80.772,54.344 ccw(c80.772,56.454) 82.264,54.962 ; JP4.8@80.772,54.344 ccw(c80.772,56.454) 82.264,54.962 ; JP4.8@80.772,54.344 ccw(c80.772,56.454) 82.264,54.962 ; JP4.8@80.772,54.598 ccw(c80.772,57.322) 82.698,55.396 ; JP4.8@80.772,54.598 ccw(c80.772,57.322) 82.698,55.396 ; JP4.8@80.772,54.598 ccw(c80.772,57.322) 82.698,55.396 ; JP4.8@80.772,54.598 ccw(c80.772,57.322) 82.698,55.396 ; JP4.8@80.772,54.598 ccw(c80.772,57.322) 82.698,55.396 ; JP4.8@80.772,54.598 ccw(c80.772,57.322) 82.698,55.396 ; JP4.8@80.772,54.598 ccw(c80.772,57.322) 82.698,55.396 ; JP4.8@80.772,54.598 ccw(c80.772,57.322) 82.698,55.396 ; JP4.8@80.772,54.598 ccw(c80.772,57.322) 82.698,55.396 ; JP4.8@80.772,54.598 ccw(c80.772,57.322) 82.698,55.396 ; JP4.8@80.772,54.852 ccw(c80.772,58.189) 83.132,55.829 ; JP4.8@80.772,54.852 ccw(c80.772,58.189) 83.132,55.829 ; JP4.8@80.772,54.852 ccw(c80.772,58.189) 83.132,55.829 ; JP4.8@80.772,54.852 ccw(c80.772,58.189) 83.132,55.829 ; JP4.8@80.772,54.852 ccw(c80.772,58.189) 83.132,55.829 ; JP4.8@80.772,54.852 ccw(c80.772,58.189) 83.132,55.829 ; JP4.8@80.772,54.852 ccw(c80.772,58.189) 83.132,55.829 ; JP4.8@80.772,54.852 ccw(c80.772,58.189) 83.132,55.829 ; JP4.8@80.772,54.852 ccw(c80.772,58.189) 83.132,55.829 ; JP4.8@80.772,54.852 ccw(c80.772,58.189) 83.132,55.829 ; JP4.8@81.383,54.107 cw(c81.531,54.078) 81.531,54.229 ; JP4.8@81.383,54.107 cw(c81.531,54.078) 81.531,54.229 ; JP4.8@81.383,54.107 cw(c81.531,54.078) 81.531,54.229 ; JP4.8@81.383,54.107 cw(c81.531,54.078) 81.531,54.229 ; JP4.8@81.383,54.107 cw(c81.531,54.078) 81.531,54.229 ; JP4.8@81.383,54.107 cw(c81.531,54.078) 81.531,54.229 ; JP4.8@81.383,54.107 cw(c81.531,54.078) 81.531,54.229 ; JP4.8@81.383,54.107 cw(c81.531,54.078) 81.531,54.229 ; JP4.8@81.383,54.107 cw(c81.531,54.078) 81.531,54.229 ; JP4.8@81.383,54.107 cw(c81.531,54.078) 81.531,54.229 ; JP4.8@81.383,54.351 ccw(c81.531,54.38) 81.531,54.229 ; JP4.8@81.383,54.351 ccw(c81.531,54.38) 81.531,54.229 ; JP4.8@81.383,54.351 ccw(c81.531,54.38) 81.531,54.229 ; JP4.8@81.383,54.351 ccw(c81.531,54.38) 81.531,54.229 ; JP4.8@81.383,54.351 ccw(c81.531,54.38) 81.531,54.229 ; JP4.8@81.383,54.351 ccw(c81.531,54.38) 81.531,54.229 ; JP4.8@81.383,54.351 ccw(c81.531,54.38) 81.531,54.229 ; JP4.8@81.383,54.351 ccw(c81.531,54.38) 81.531,54.229 ; JP4.8@81.383,54.351 ccw(c81.531,54.38) 81.531,54.229 ; JP4.8@81.383,54.351 ccw(c81.531,54.38) 81.531,54.229 ; 87.679,60.377 ccw(c86.335,61.721) U1.16@88.236,61.721 ; 87.679,60.377 ccw(c86.335,61.721) U1.16@88.236,61.721 ; 87.679,60.377 ccw(c86.335,61.721) U1.16@88.236,61.721 ; 87.679,60.377 ccw(c86.335,61.721) U1.16@88.236,61.721 ; 87.769,60.467 cw(c88.896,59.339) U1.16@88.896,60.934 ; 87.769,60.467 ccw(c86.641,61.594) U1.16@88.236,61.594 ; 87.769,60.467 ccw(c86.641,61.594) U1.16@88.236,61.594 ; 87.769,60.467 cw(c88.896,59.339) U1.16@88.896,60.934 ; 87.769,60.467 ccw(c86.641,61.594) U1.16@88.236,61.594 ; 87.769,60.467 cw(c88.896,59.339) U1.16@88.896,60.934 ; 87.769,60.467 ccw(c86.641,61.594) U1.16@88.236,61.594 ; 87.769,60.467 cw(c88.896,59.339) U1.16@88.896,60.934 ; 87.769,60.467 ccw(c86.641,61.594) U1.16@88.236,61.594 ; 87.769,60.467 cw(c88.896,59.339) U1.16@88.896,60.934 ; 87.769,60.467 ccw(c86.641,61.594) U1.16@88.236,61.594 ; 87.769,60.467 cw(c88.896,59.339) U1.16@88.896,60.934 ; 87.986,60.683 cw(c88.896,59.773) U1.16@88.896,61.061 ; 87.986,60.683 cw(c88.896,59.773) U1.16@88.896,61.061 ; 87.986,60.683 cw(c88.896,59.773) U1.16@88.896,61.061 ; 87.986,60.683 cw(c88.896,59.773) U1.16@88.896,61.061 ; 88.113,60.81 ccw(c87.202,61.721) U1.16@88.49,61.721 ; 88.113,60.81 ccw(c87.202,61.721) U1.16@88.49,61.721 ; 88.113,60.81 ccw(c87.202,61.721) U1.16@88.49,61.721 ; 88.113,60.81 ccw(c87.202,61.721) U1.16@88.49,61.721 ; 88.202,60.9 cw(c88.896,60.206) U1.16@88.896,61.188 ; 88.202,60.9 ccw(c87.509,61.594) U1.16@88.49,61.594 ; 88.202,60.9 ccw(c87.509,61.594) U1.16@88.49,61.594 ; 88.202,60.9 cw(c88.896,60.206) U1.16@88.896,61.188 ; 88.202,60.9 ccw(c87.509,61.594) U1.16@88.49,61.594 ; 88.202,60.9 cw(c88.896,60.206) U1.16@88.896,61.188 ; 88.202,60.9 ccw(c87.509,61.594) U1.16@88.49,61.594 ; 88.202,60.9 cw(c88.896,60.206) U1.16@88.896,61.188 ; 88.202,60.9 ccw(c87.509,61.594) U1.16@88.49,61.594 ; 88.202,60.9 cw(c88.896,60.206) U1.16@88.896,61.188 ; 88.202,60.9 ccw(c87.509,61.594) U1.16@88.49,61.594 ; 88.202,60.9 cw(c88.896,60.206) U1.16@88.896,61.188
NetJP4_9: JP4.9 U1.17 | length 118.8
  Top Layer w0.254: JP4.9@80.772,51.689 81.531,51.689 ; U1.17@88.896,59.054 81.531,51.689 ; JP4.9@80.772,51.55 ccw(c80.772,53.047) 81.831,51.989 ; JP4.9@80.772,51.55 ccw(c80.772,53.047) 81.831,51.989 ; JP4.9@80.772,51.55 ccw(c80.772,53.047) 81.831,51.989 ; JP4.9@80.772,51.55 ccw(c80.772,53.047) 81.831,51.989 ; JP4.9@80.772,51.55 ccw(c80.772,53.047) 81.831,51.989 ; JP4.9@80.772,51.55 ccw(c80.772,53.047) 81.831,51.989 ; JP4.9@80.772,51.55 ccw(c80.772,53.047) 81.831,51.989 ; JP4.9@80.772,51.55 ccw(c80.772,53.047) 81.831,51.989 ; JP4.9@80.772,51.55 ccw(c80.772,53.047) 81.831,51.989 ; JP4.9@80.772,51.55 ccw(c80.772,53.047) 81.831,51.989 ; JP4.9@80.772,51.804 ccw(c80.772,53.914) 82.264,52.422 ; JP4.9@80.772,51.804 ccw(c80.772,53.914) 82.264,52.422 ; JP4.9@80.772,51.804 ccw(c80.772,53.914) 82.264,52.422 ; JP4.9@80.772,51.804 ccw(c80.772,53.914) 82.264,52.422 ; JP4.9@80.772,51.804 ccw(c80.772,53.914) 82.264,52.422 ; JP4.9@80.772,51.804 ccw(c80.772,53.914) 82.264,52.422 ; JP4.9@80.772,51.804 ccw(c80.772,53.914) 82.264,52.422 ; JP4.9@80.772,51.804 ccw(c80.772,53.914) 82.264,52.422 ; JP4.9@80.772,51.804 ccw(c80.772,53.914) 82.264,52.422 ; JP4.9@80.772,51.804 ccw(c80.772,53.914) 82.264,52.422 ; JP4.9@80.772,52.058 ccw(c80.772,54.782) 82.698,52.856 ; JP4.9@80.772,52.058 ccw(c80.772,54.782) 82.698,52.856 ; JP4.9@80.772,52.058 ccw(c80.772,54.782) 82.698,52.856 ; JP4.9@80.772,52.058 ccw(c80.772,54.782) 82.698,52.856 ; JP4.9@80.772,52.058 ccw(c80.772,54.782) 82.698,52.856 ; JP4.9@80.772,52.058 ccw(c80.772,54.782) 82.698,52.856 ; JP4.9@80.772,52.058 ccw(c80.772,54.782) 82.698,52.856 ; JP4.9@80.772,52.058 ccw(c80.772,54.782) 82.698,52.856 ; JP4.9@80.772,52.058 ccw(c80.772,54.782) 82.698,52.856 ; JP4.9@80.772,52.058 ccw(c80.772,54.782) 82.698,52.856 ; JP4.9@80.772,52.312 ccw(c80.772,55.649) 83.132,53.289 ; JP4.9@80.772,52.312 ccw(c80.772,55.649) 83.132,53.289 ; JP4.9@80.772,52.312 ccw(c80.772,55.649) 83.132,53.289 ; JP4.9@80.772,52.312 ccw(c80.772,55.649) 83.132,53.289 ; JP4.9@80.772,52.312 ccw(c80.772,55.649) 83.132,53.289 ; JP4.9@80.772,52.312 ccw(c80.772,55.649) 83.132,53.289 ; JP4.9@80.772,52.312 ccw(c80.772,55.649) 83.132,53.289 ; JP4.9@80.772,52.312 ccw(c80.772,55.649) 83.132,53.289 ; JP4.9@80.772,52.312 ccw(c80.772,55.649) 83.132,53.289 ; JP4.9@80.772,52.312 ccw(c80.772,55.649) 83.132,53.289 ; JP4.9@81.383,51.567 cw(c81.531,51.538) 81.531,51.689 ; JP4.9@81.383,51.567 cw(c81.531,51.538) 81.531,51.689 ; JP4.9@81.383,51.567 cw(c81.531,51.538) 81.531,51.689 ; JP4.9@81.383,51.567 cw(c81.531,51.538) 81.531,51.689 ; JP4.9@81.383,51.567 cw(c81.531,51.538) 81.531,51.689 ; JP4.9@81.383,51.567 cw(c81.531,51.538) 81.531,51.689 ; JP4.9@81.383,51.567 cw(c81.531,51.538) 81.531,51.689 ; JP4.9@81.383,51.567 cw(c81.531,51.538) 81.531,51.689 ; JP4.9@81.383,51.567 cw(c81.531,51.538) 81.531,51.689 ; JP4.9@81.383,51.567 cw(c81.531,51.538) 81.531,51.689 ; JP4.9@81.383,51.811 ccw(c81.531,51.84) 81.531,51.689 ; JP4.9@81.383,51.811 ccw(c81.531,51.84) 81.531,51.689 ; JP4.9@81.383,51.811 ccw(c81.531,51.84) 81.531,51.689 ; JP4.9@81.383,51.811 ccw(c81.531,51.84) 81.531,51.689 ; JP4.9@81.383,51.811 ccw(c81.531,51.84) 81.531,51.689 ; JP4.9@81.383,51.811 ccw(c81.531,51.84) 81.531,51.689 ; JP4.9@81.383,51.811 ccw(c81.531,51.84) 81.531,51.689 ; JP4.9@81.383,51.811 ccw(c81.531,51.84) 81.531,51.689 ; JP4.9@81.383,51.811 ccw(c81.531,51.84) 81.531,51.689 ; JP4.9@81.383,51.811 ccw(c81.531,51.84) 81.531,51.689 ; 87.679,57.837 ccw(c86.335,59.181) U1.17@88.236,59.181 ; 87.679,57.837 ccw(c86.335,59.181) U1.17@88.236,59.181 ; 87.679,57.837 ccw(c86.335,59.181) U1.17@88.236,59.181 ; 87.679,57.837 ccw(c86.335,59.181) U1.17@88.236,59.181 ; 87.769,57.927 ccw(c86.641,59.054) U1.17@88.236,59.054 ; 87.769,57.927 ccw(c86.641,59.054) U1.17@88.236,59.054 ; 87.769,57.927 ccw(c86.641,59.054) U1.17@88.236,59.054 ; 87.769,57.927 ccw(c86.641,59.054) U1.17@88.236,59.054 ; 87.769,57.927 ccw(c86.641,59.054) U1.17@88.236,59.054 ; 87.769,57.927 ccw(c86.641,59.054) U1.17@88.236,59.054 ; 88.113,58.27 ccw(c87.202,59.181) U1.17@88.49,59.181 ; 88.113,58.27 ccw(c87.202,59.181) U1.17@88.49,59.181 ; 88.113,58.27 ccw(c87.202,59.181) U1.17@88.49,59.181 ; 88.113,58.27 ccw(c87.202,59.181) U1.17@88.49,59.181 ; 88.161,58.319 cw(c88.734,57.746) U1.17@88.734,58.556 ; 88.161,58.319 cw(c88.734,57.746) U1.17@88.734,58.556 ; 88.161,58.319 cw(c88.734,57.746) U1.17@88.734,58.556 ; 88.161,58.319 cw(c88.734,57.746) U1.17@88.734,58.556 ; 88.161,58.319 cw(c88.734,57.746) U1.17@88.734,58.556 ; 88.161,58.319 cw(c88.734,57.746) U1.17@88.734,58.556 ; 88.202,58.36 ccw(c87.509,59.054) U1.17@88.49,59.054 ; 88.202,58.36 ccw(c87.509,59.054) U1.17@88.49,59.054 ; 88.202,58.36 ccw(c87.509,59.054) U1.17@88.49,59.054 ; 88.202,58.36 ccw(c87.509,59.054) U1.17@88.49,59.054 ; 88.202,58.36 ccw(c87.509,59.054) U1.17@88.49,59.054 ; 88.202,58.36 ccw(c87.509,59.054) U1.17@88.49,59.054 ; 88.378,58.535 cw(c88.734,58.179) U1.17@88.734,58.683 ; 88.378,58.535 cw(c88.734,58.179) U1.17@88.734,58.683 ; 88.378,58.535 cw(c88.734,58.179) U1.17@88.734,58.683 ; 88.378,58.535 cw(c88.734,58.179) U1.17@88.734,58.683
NetU4_9: 
NetU4_10: 

## Text inside footprints (layer, text, board x,y; h text height)
J61: Top Overlay "1" at 76.605,76.379 h1.5 r90; Top Overlay "5" at 76.605,87.209 h1.5 r90; Top Overlay "9" at 67.205,85.824 h1.5 r90; Top Overlay "6" at 67.205,77.514 h1.5 r90
JP5: Top Overlay "10" at 109.22,108.585 h1.27; Top Overlay "9" at 109.22,106.045 h1.27; Top Overlay "1" at 95.504,106.045 h1.27; Top Overlay "2" at 94.996,108.585 h1.27